# Altium PCB monitor.PcbDoc
Units mil, origin at the board's own origin, x right, y up, seen from the top; angles counter-clockwise.
Board outline 4460 x 3165 mil, 2 copper layers (Top Layer, Bottom Layer); 5 components, 13 nets, 85 pads, 1 vias.
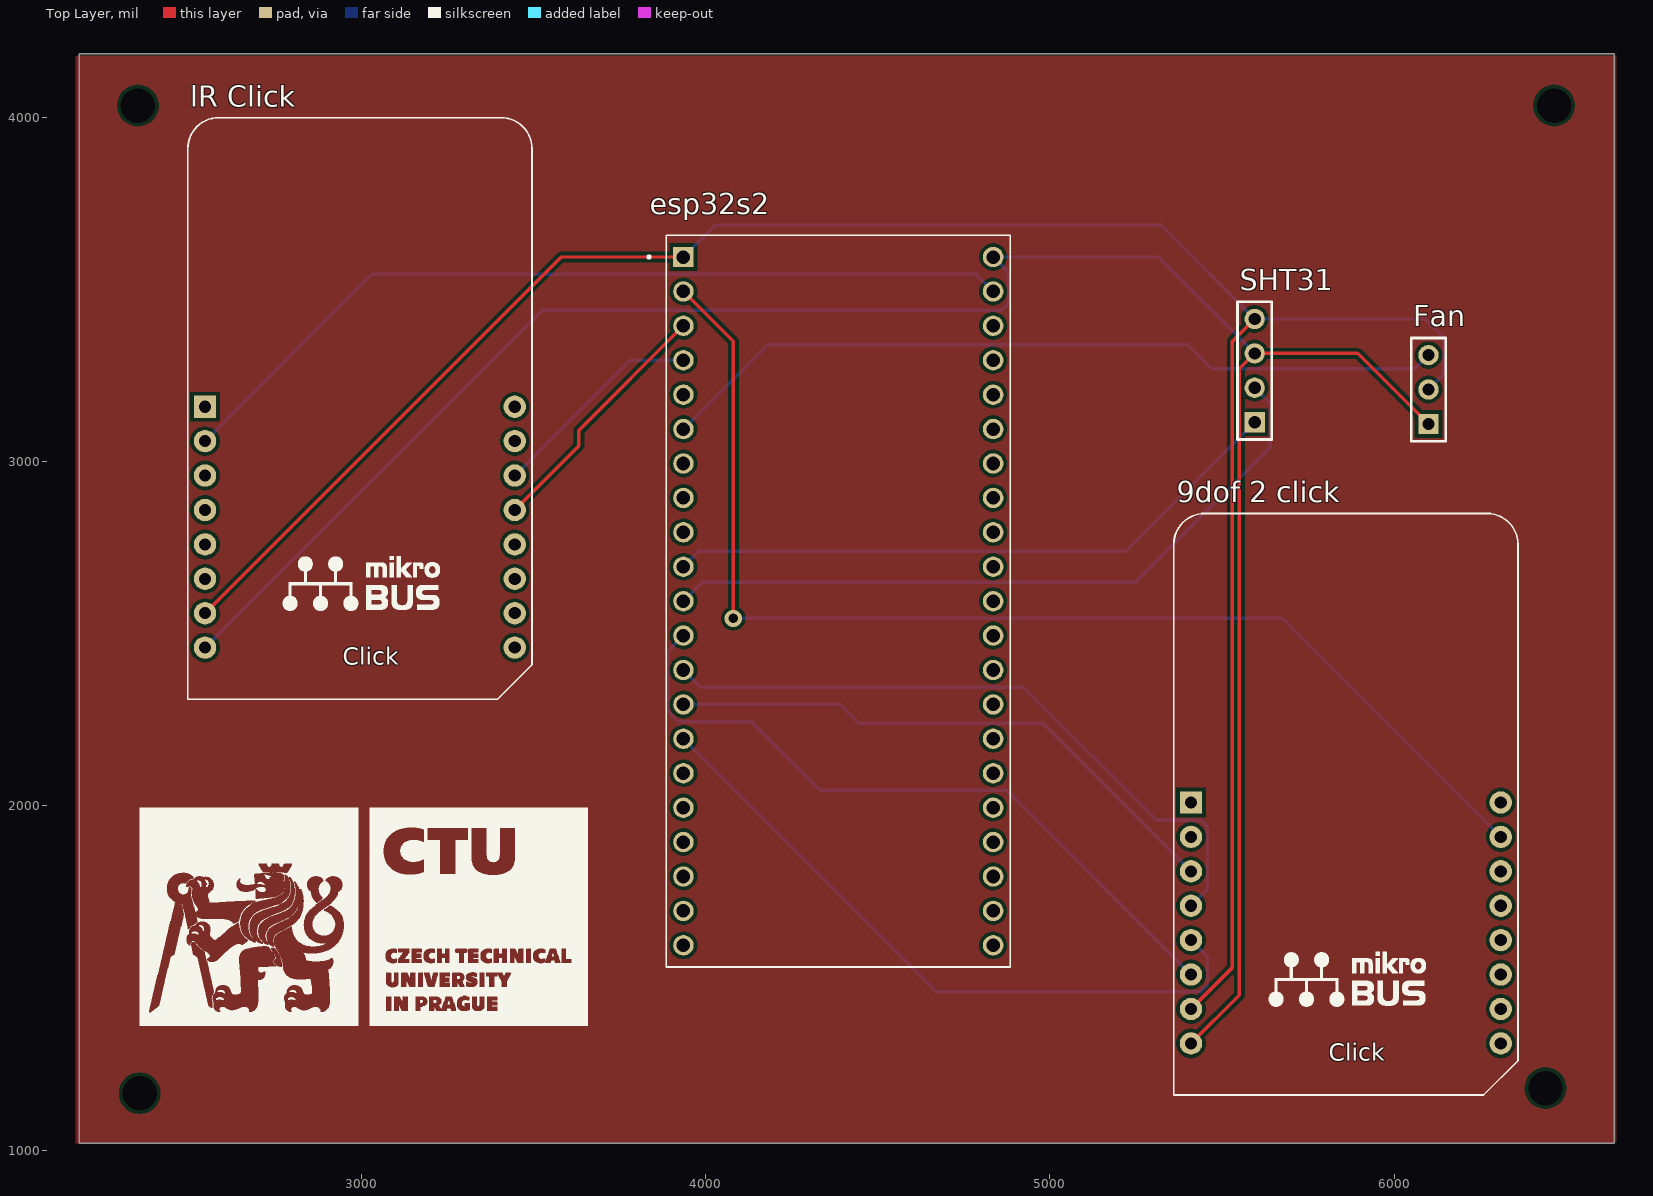
[diagram p0: Top Layer view]
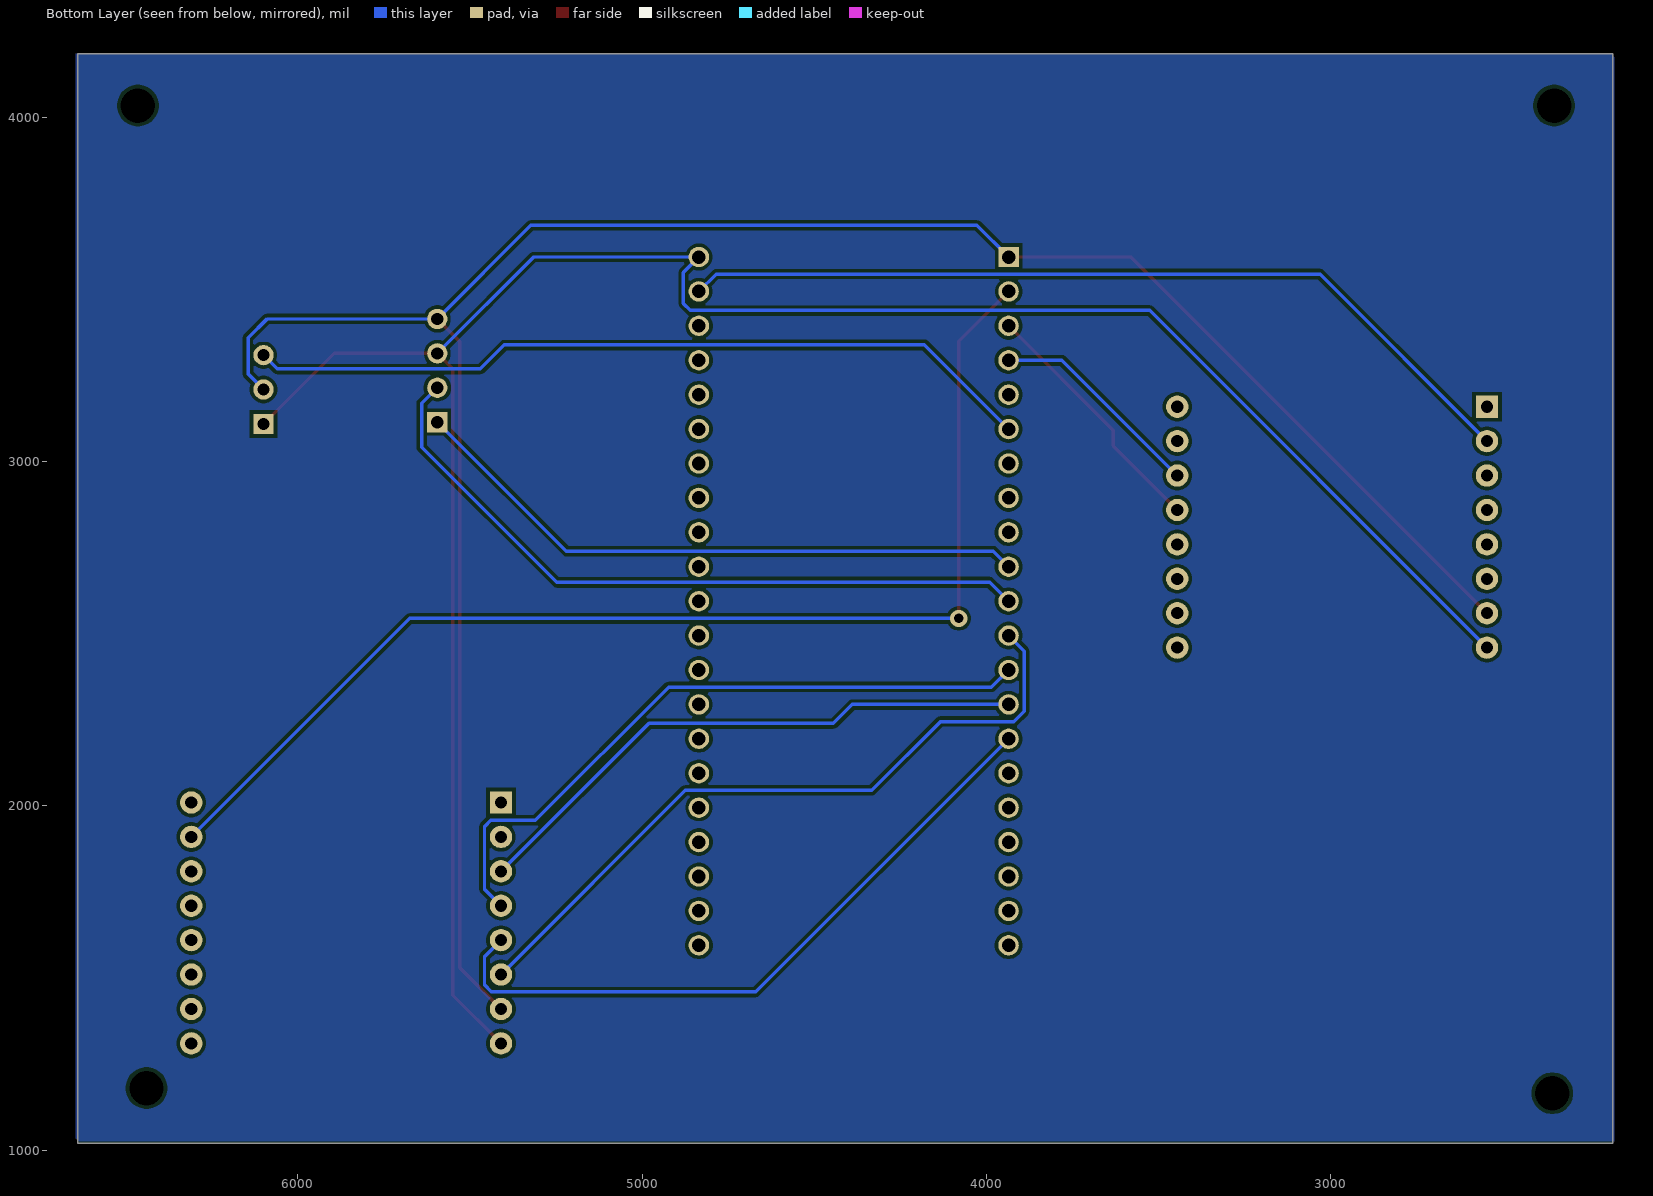
[diagram p1: Bottom Layer view, seen from below]

## Layer stack, top to bottom
Top Solder: solder mask 0.4, Solder Resist, Dk 3.5
Top Layer: signal copper 1.4
Dielectric 1: dielectric 12.6, FR-4, Dk 4.8
Bottom Layer: signal copper 1.4
Bottom Solder: solder mask 0.4, Solder Resist, Dk 3.5

## Board outline
2180,1020 6640,1020 6640,4185 2180,4185

## Design rules (kind name [scope] priority, off if disabled: settings)
Clearance [All] p1: gap=10 ignorepadtopadclearanceinfootprint=FALSE except(0: Arc-Hole Track-Hole SMDPad-Hole THPad-Hole Via-Hole Fill-Hole Poly-Hole Region-Hole Text-Hole)
PolygonConnect [All] p1: connectstyle=Relief reliefconductorwidth=10 reliefentries=4 polygonreliefangle="90 Angle" airgapwidth=10
RoutingVias [All] p1: holewidth=28 width=50 viastyle="Through Hole" minholewidth=28 minwidth=50 maxholewidth=28 maxwidth=50
SolderMaskExpansion [All] p1: expansion=4 istentingtop=FALSE
Width [All] p1: maxlimit=10 minlimit=10 preferedwidth=10
30 further rules are at their usual default settings.

## Components (designator, comment, footprint, x,y, rotation, side; value= is the part's Value field where it differs from the comment)
"9dof 2 click" "MIKROE-2371" MIKROE-2371 5410,1310 r0 top
esp32s2 "ESP32-S2-DEVKITM-1U" XCVR_ESP32-S2-DEVKITM-1U 4385,2595 r0 top
Fan "Header 3" HDR1X3 6100,3110 r90 top
"lR Click" "MIKROE-2371" MIKROE-2371 2545,2460 r0 top
SHT31 "Header 4" HDR1X4 5595,3115 r90 top

## Footprints (in the part's own frame and the unit in brackets; to place one, negate y for a bottom-side part, rotate by r counter-clockwise, add the part's x,y. Pads: shape width x height; smd on the part's side, far side on the other; paste and mask are expansions set on the pad)
HDR1X3 [mm] "Connector; Header; 3 Position"
  rect 1.5x1.5 hole 0.9: 1(0,0)
  round 1.5 hole 0.9: 2(2.54,0) 3(5.08,0)
  silkscreen extent -1.27,-1.27 6.35,1.27
HDR1X4 [mm] "Connector; Header; 4 Position"
  rect 1.5x1.5 hole 0.9: 1(0,0)
  round 1.5 hole 0.9: 2(2.54,0) 3(5.08,0) 4(7.62,0)
  silkscreen extent -1.27,-1.27 8.89,1.27
MIKROE-2371 [mil]
  rect 65x65 / inner round 65 / far side rect 65x65 hole 35: 1(0,700)
  round 65 hole 35: 2(0,600) 3(0,500) 4(0,400) 5(0,300) 6(0,200) 7(0,100) 8(0,0) 9(900,0) 10(900,100) 11(900,200) 12(900,300) 13(900,400) 14(900,500) 15(900,600) 16(900,700)
  silkscreen extent -50,-150 950,1540
XCVR_ESP32-S2-DEVKITM-1U [mm]
  rect 1.508x1.508 / inner round 1.508 / far side rect 1.508x1.508 hole 1: J1_1(-11.43,25.4)
  round 1.508 hole 1: J1_2(-11.43,22.86) J1_3(-11.43,20.32) J1_4(-11.43,17.78) J1_5(-11.43,15.24) J1_6(-11.43,12.7) J1_7(-11.43,10.16) J1_8(-11.43,7.62) J1_9(-11.43,5.08) J1_10(-11.43,2.54) J1_11(-11.43,0) J1_12(-11.43,-2.54) J1_13(-11.43,-5.08) J1_14(-11.43,-7.62) J1_15(-11.43,-10.16) J1_16(-11.43,-12.7) J1_17(-11.43,-15.24) J1_18(-11.43,-17.78) J1_19(-11.43,-20.32) J1_20(-11.43,-22.86) J1_21(-11.43,-25.4) J3_1(11.43,25.4) J3_2(11.43,22.86) J3_3(11.43,20.32) J3_4(11.43,17.78) J3_5(11.43,15.24) J3_6(11.43,12.7) J3_7(11.43,10.16) J3_8(11.43,7.62) J3_9(11.43,5.08) J3_10(11.43,2.54) J3_11(11.43,0) J3_12(11.43,-2.54) J3_13(11.43,-5.08) J3_14(11.43,-7.62) J3_15(11.43,-10.16) J3_16(11.43,-12.7) J3_17(11.43,-15.24) J3_18(11.43,-17.78) J3_19(11.43,-20.32) J3_20(11.43,-22.86) J3_21(11.43,-25.4)
  silkscreen extent -14.07,-27 12.7,27, body extent -12.7,-27.95 12.7,27, height 6.84

## Part data
"9dof 2 click" "lR Click": "Noise Click Board", Package=None, Check_prices=https://www.snapeda.com/parts/MIKROE-2371/MikroElektronika/view-part/?ref=eda, MF=MikroElektronika, MP=MIKROE-2371, SnapEDA_Link=https://www.snapeda.com/parts/MIKROE-2371/MikroElektronika/view-part/?ref=snap
esp32s2: "WiFi Development Tools (802.11) [ENGINEERING SAMPLES ONLY]General-Purpose Development Board, embeds ESP32-S2-MINI-1U, 4 MB flash", Package=None, Check_prices=https://www.snapeda.com/parts/ESP32-S2-DEVKITM-1U/Espressif+Systems/view-part/?ref=eda, MF="Espressif Systems", MP=ESP32-S2-DEVKITM-1U, SnapEDA_Link=https://www.snapeda.com/parts/ESP32-S2-DEVKITM-1U/Espressif+Systems/view-part/?ref=snap
Fan: "Header, 3-Pin", LatestRevisionDate=17-Jul-2002, LatestRevisionNote="Re-released for DXP Platform.", Publisher="Altium Limited"
SHT31: "Header, 4-Pin", LatestRevisionDate=17-Jul-2002, LatestRevisionNote="Re-released for DXP Platform.", Publisher="Altium Limited"

## Free pads (board coordinates)
  round 60 hole 100: 7(2350,4035) 8(2355,1165) 9(6440,1180) 10(6465,4035)

## Via types
v1: diameter 50, hole 28, Top Layer to Bottom Layer, 1 vias

## Nets (pads, with @x,y where several pads share a name; then routed paths per layer and width w, separated by ;. In a path a pad name is that pad's centre, name@x,y a point inside that pad or via, vN(x,y) a via of type N, cw(c..) or ccw(c..) an arc to the next point about the centre after c; other vN are vias at no path point)
"Net9dof 2 click_3": "9dof 2 click.3" esp32s2.J1_14 | length 1675.9
  Bottom Layer w10: esp32s2.J1_14 4389,2295 4444,2240 4980,2240 5410,1810
"Net9dof 2 click_4": "9dof 2 click.4" esp32s2.J1_13 | length 1961.3
  Bottom Layer w10: esp32s2.J1_13 3985,2345 4923,2345 5310,1958 5440,1958 5458,1940 5458,1758 5410,1710
"Net9dof 2 click_5": "9dof 2 click.5" esp32s2.J1_15 | length 1985.6
  Bottom Layer w10: esp32s2.J1_15 4670,1460 5438,1460 5458,1480 5458,1562 5410,1610
"Net9dof 2 click_6": "9dof 2 click.6" esp32s2.J1_12 | length 2075.5
  Bottom Layer w10: esp32s2.J1_12 3890,2450 3890,2275 3920,2245 4133,2245 4333,2045 4875,2045 5410,1510
"Net9dof 2 click_7": "9dof 2 click.7" "lR Click.7" esp32s2.J1_1 Fan.2 SHT31.4 | length 6452.5
  Top Layer w10: 2545,2560 3580,3595 esp32s2.J1_1 ; 5410,1410 5530.47,1530.47 5530.47,3350.47 SHT31.4
  Bottom Layer w10: esp32s2.J1_1 4027,3687 5323,3687 SHT31.4 6090,3415 6145,3360 6145,3255 Fan.2
"Net9dof 2 click_8": "9dof 2 click.8" "lR Click.8" esp32s2.J3_1 Fan.1 SHT31.3 | length 6450.4
  Top Layer w10: 5410,1310 5550.47,1450.47 5550.47,3270.47 SHT31.3 5895,3315 Fan.1
  Bottom Layer w10: 2545,2460 3525,3440 4860,3440 4880,3460 4880,3550 esp32s2.J3_1 5315,3595 SHT31.3
"Net9dof 2 click_15": "9dof 2 click.15" esp32s2.J1_2 | length 3503.1
  Top Layer w10: esp32s2.J1_2 4080,3350 v1(4080,2545)
  Bottom Layer w10: v1(4080,2545) 5675,2545 6310,1910
Netesp32s2_J1_3: "lR Click.13" esp32s2.J1_3 | length 738
  Top Layer w10: 3445,2860 3631,3046 3631,3091 esp32s2.J1_3
Netesp32s2_J1_4: "lR Click.14" esp32s2.J1_4 | length 628.8
  Bottom Layer w10: 3445,2960 3780,3295 esp32s2.J1_4
Netesp32s2_J1_6: esp32s2.J1_6 Fan.3 | length 2312
  Bottom Layer w10: esp32s2.J1_6 4180,3340 5400,3340 5470,3270 6060,3270 Fan.3
Netesp32s2_J1_10: esp32s2.J1_10 SHT31.1 | length 1834
  Bottom Layer w10: esp32s2.J1_10 3980,2740 5220,2740 SHT31.1
Netesp32s2_J1_11: esp32s2.J1_11 SHT31.2 | length 2081.8
  Bottom Layer w10: esp32s2.J1_11 3990,2650 5248,2650 5640,3042 5640,3170 SHT31.2
Netesp32s2_J3_2: "lR Click.2" esp32s2.J3_2 | length 2511.6
  Bottom Layer w10: 2545,3060 3030,3545 4785,3545 esp32s2.J3_2
pads on no net: "9dof 2 click.1" "9dof 2 click.2" "9dof 2 click.9" "9dof 2 click.10" "9dof 2 click.11" "9dof 2 click.12" "9dof 2 click.13" "9dof 2 click.14" "9dof 2 click.16" "lR Click.1" "lR Click.3" "lR Click.4" "lR Click.5" "lR Click.6" "lR Click.9" "lR Click.10" "lR Click.11" "lR Click.12" "lR Click.15" "lR Click.16" esp32s2.J1_5 esp32s2.J1_7 esp32s2.J1_8 esp32s2.J1_9 esp32s2.J1_16 esp32s2.J1_17 esp32s2.J1_18 esp32s2.J1_19 esp32s2.J1_20 esp32s2.J1_21 esp32s2.J3_3 esp32s2.J3_4 esp32s2.J3_5 esp32s2.J3_6 esp32s2.J3_7 esp32s2.J3_8 esp32s2.J3_9 esp32s2.J3_10 esp32s2.J3_11 esp32s2.J3_12 esp32s2.J3_13 esp32s2.J3_14 esp32s2.J3_15 esp32s2.J3_16 esp32s2.J3_17 esp32s2.J3_18 esp32s2.J3_19 esp32s2.J3_20 esp32s2.J3_21

## Polygon pours and split planes (outlines as drawn)
no net on Bottom Layer "NONET_L02_P000" (solid, pour order 0): 2180,4180 2175,4175 2175,1025 6635,1025 6645,1035 6645,4185 2180,4185
no net on Top Layer "NONET_L01_P001" (solid, pour order 1): 2175,4185 2170,4180 2170,1020 6640,1020 6645,1025 6645,4180 2175,4180

## Silkscreen, mask and mechanical layers (free items; w line width, h text height)
Top Overlay:
  drawing of 17 lines, arcs and shapes, not listed

## Text inside footprints (layer, text, board x,y; h text height)
"9dof 2 click": Top Overlay "Click" at 5810,1260 h50
"lR Click": Top Overlay "Click" at 2945,2410 h50